# Altium PCB PCB1.PcbDoc
Units mm, origin at the board's own origin, x right, y up, seen from the top; angles counter-clockwise.
Board outline 130 x 90 mm, 4 copper layers (Top Layer, Layer 1, Layer 2, Bottom Layer), stack 0.603 mm thick; 110 components, 85 nets, 364 pads, 121 vias.
Unrouted connection lines stored in the file: 16.
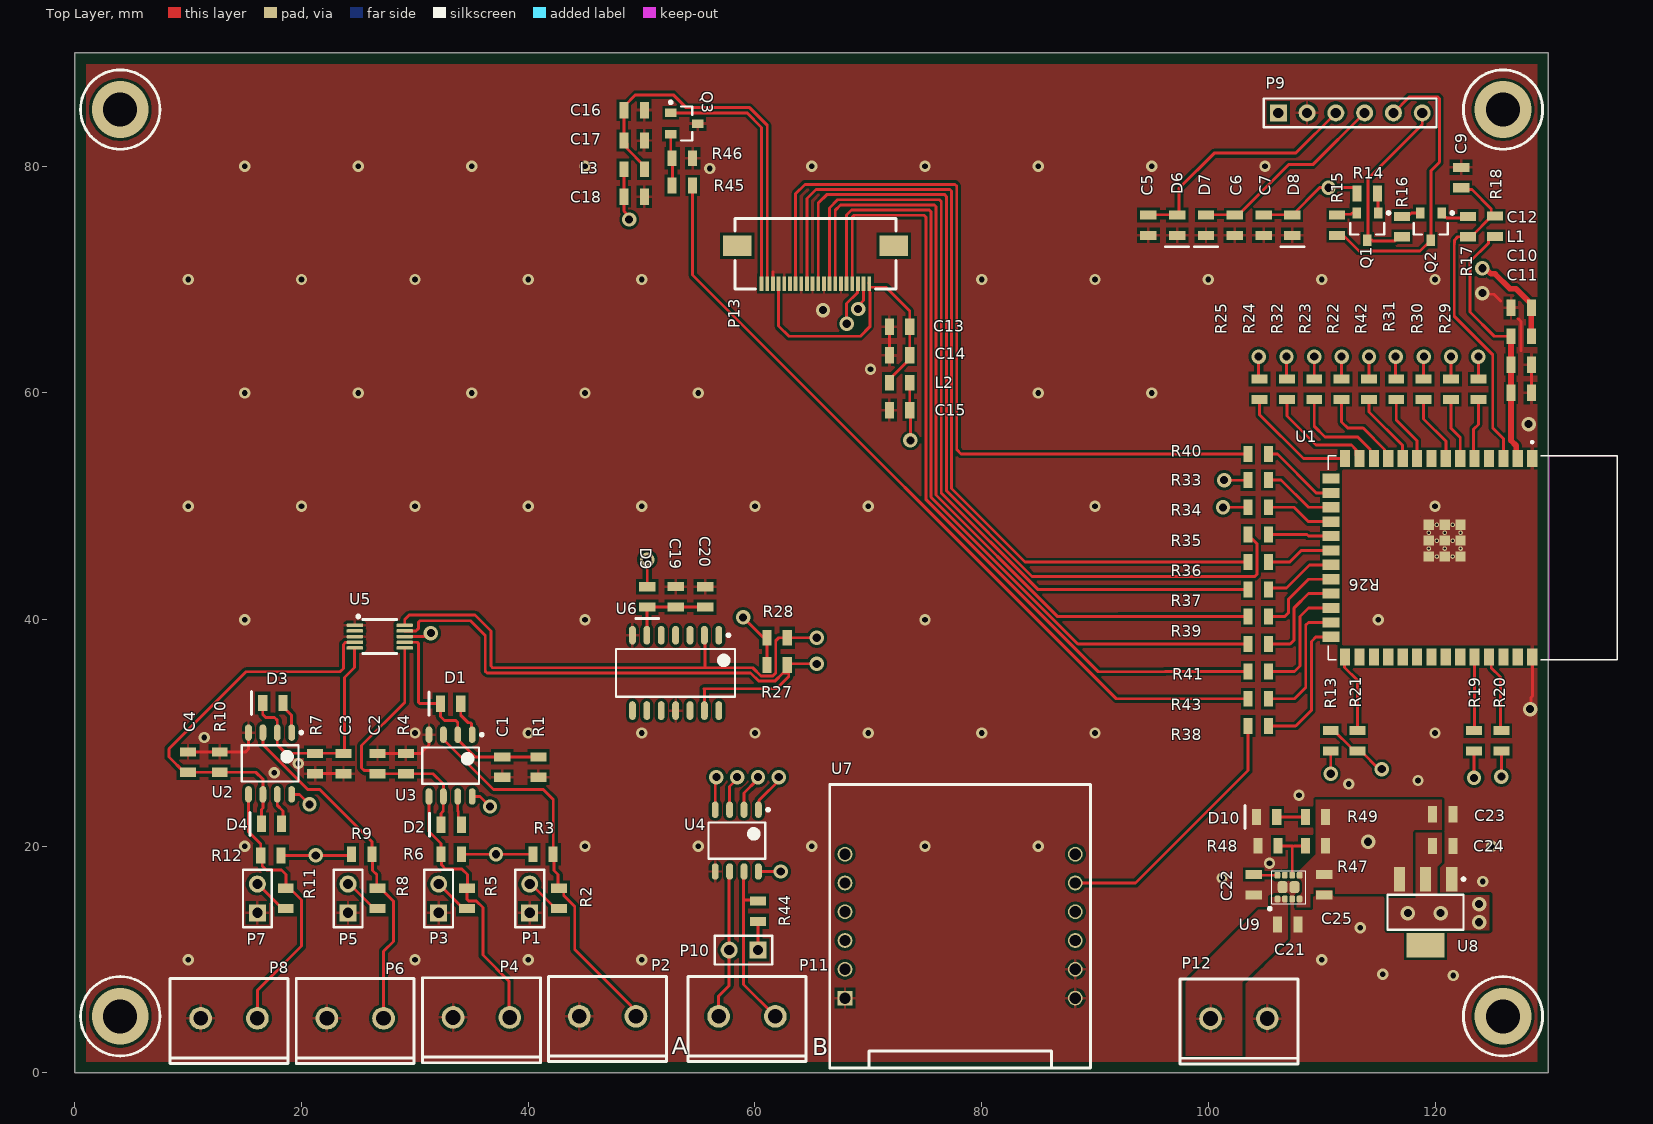
[diagram p0: Top Layer view]
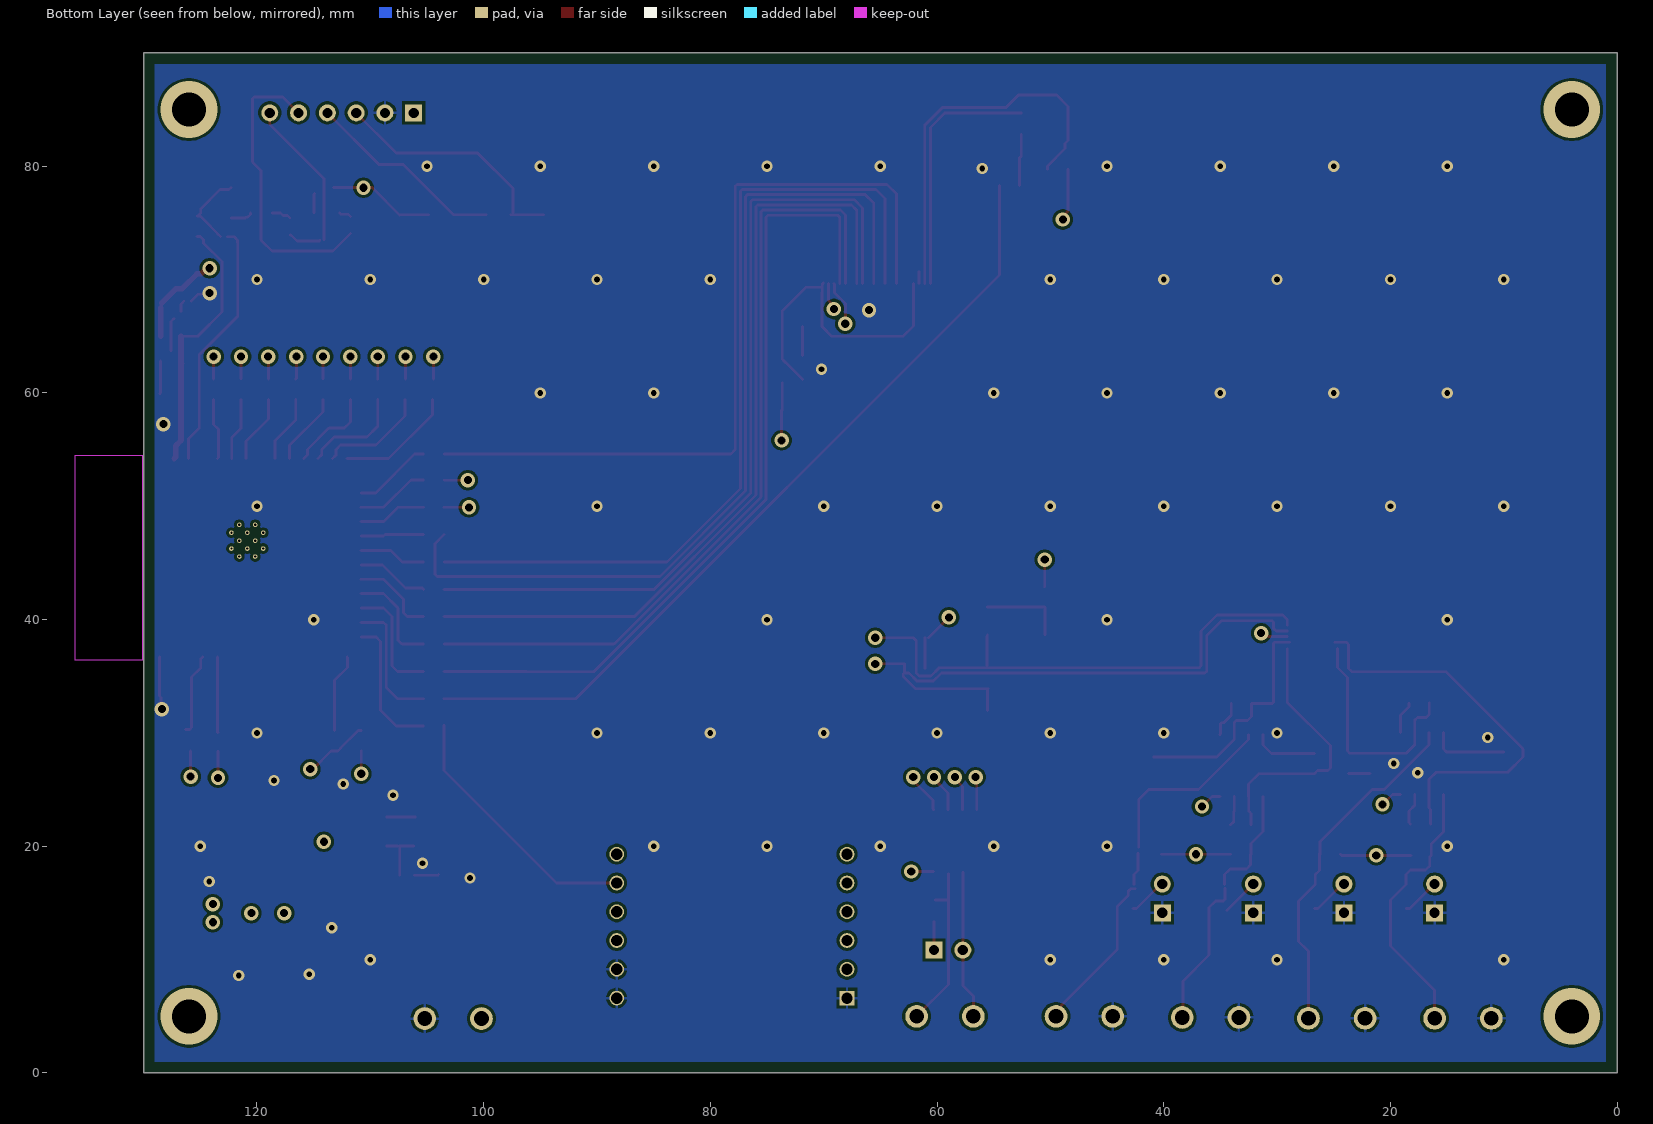
[diagram p1: Bottom Layer view, seen from below]
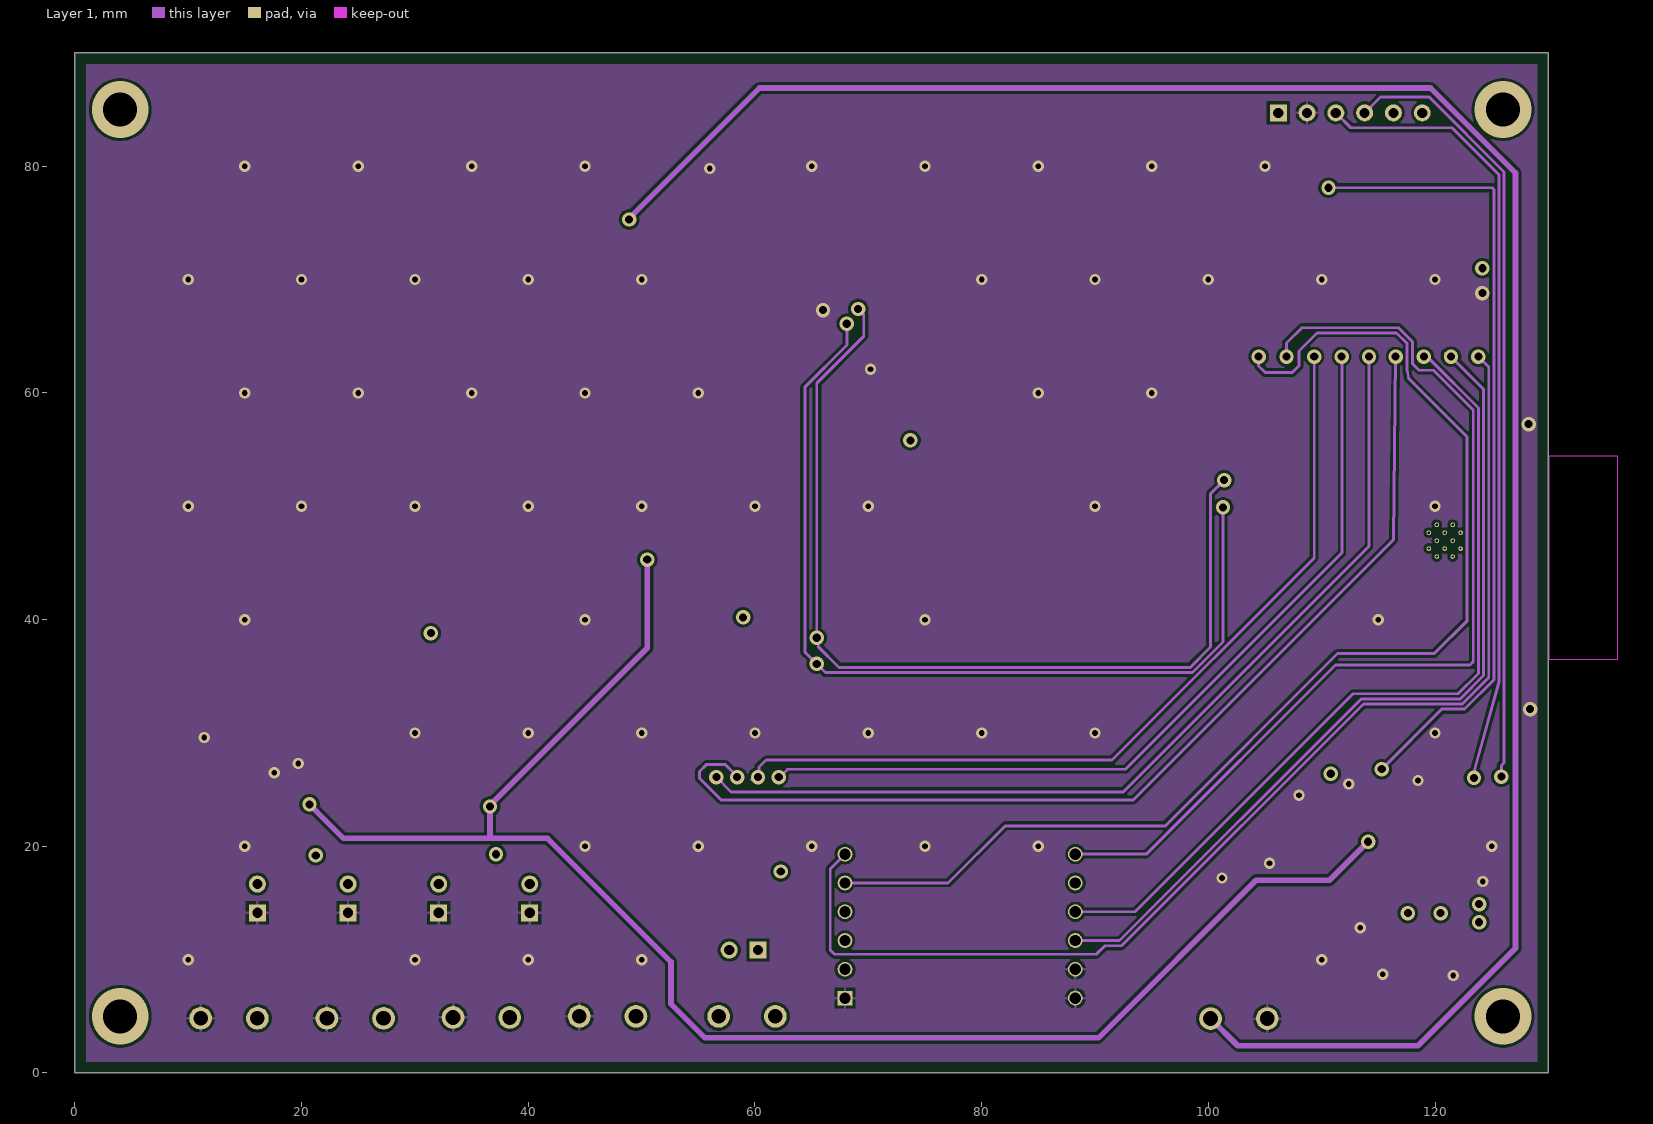
[diagram p2: Layer 1]
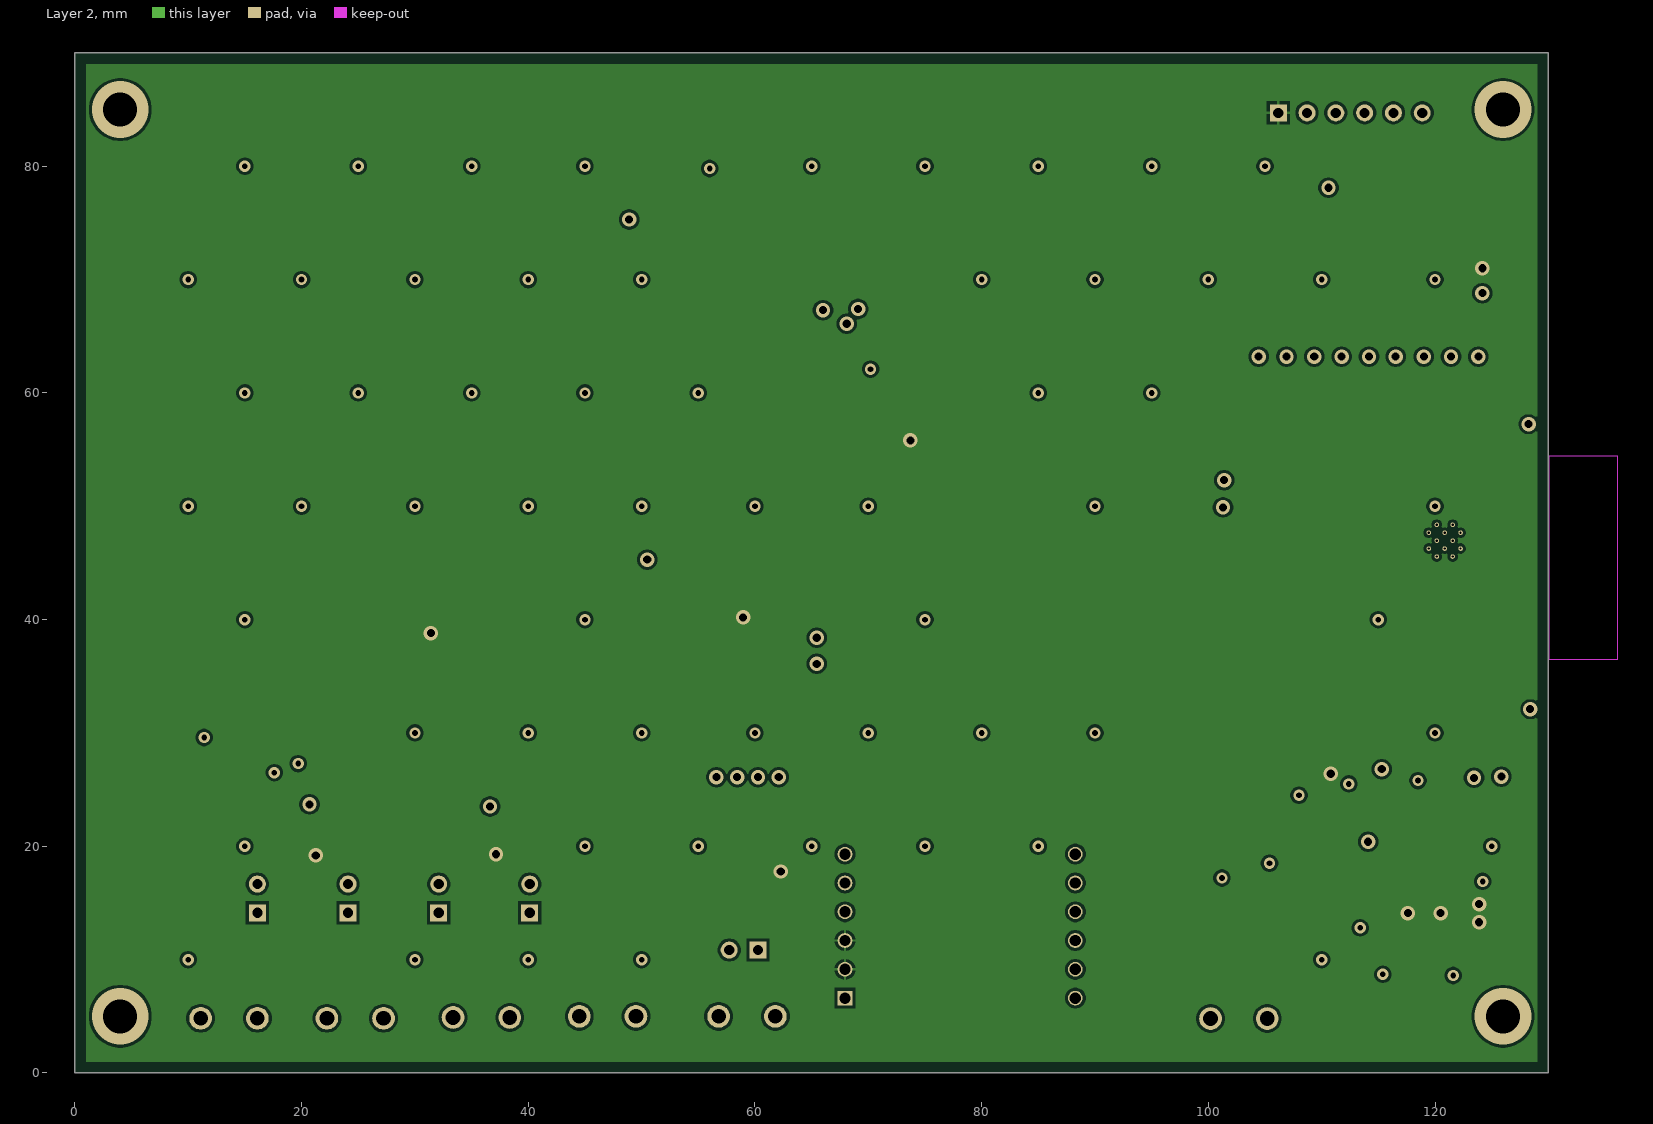
[diagram p3: Layer 2]

## Layer stack, top to bottom
Top Solder: solder mask 0.0102, Solder Resist, Dk 3.5
Top Layer: signal copper 0.0356
Dielectric 2: prepreg 0.0711, PP-006, Dk 4.1
Layer 1: signal copper 0.035
Dielectric 1: dielectric 0.32, FR-4, Dk 4.8
Layer 2: signal copper 0.035
Dielectric 3: prepreg 0.0711, PP-006, Dk 4.1
Bottom Layer: signal copper 0.0356
Bottom Solder: solder mask 0.0102, Solder Resist, Dk 3.5

## Board outline
0,0 0,90 130,90 130,0

## Design rules (kind name [scope] priority, off if disabled: settings)
Clearance [All] p1: gap=0.254 ignorepadtopadclearanceinfootprint=FALSE except(0: Arc-Hole Track-Hole SMDPad-Hole THPad-Hole Via-Hole Fill-Hole Poly-Hole Region-Hole Text-Hole; 0.15: Arc-SMDPad Track-SMDPad SMDPad-SMDPad; 0.2: Arc-Arc Arc-Track Track-Track)
HoleSize [All] p1: absolutevalues=TRUE maxlimit=3 minlimit=0.025 maxpercent=80.000 minpercent=20.000
MinimumSolderMaskSliver [All] p1: minsoldermaskwidth=0.1
PlaneConnect [All] p1: planeconnectstyle=Direct reliefexpansion=0.508 reliefentries=4 reliefconductorwidth=0.254 reliefairgap=0.254
PolygonConnect PolygonConnect_22 [All vs IsNamedPolygon('GND_L01_P010')] p1: thpad.connectstyle=Relief thpad.reliefconductorwidth=0.254 thpad.reliefentries=4 thpad.polygonreliefangle="90 Angle" thpad.airgapwidth=0.254 smdpad.connectstyle=Relief smdpad.reliefconductorwidth=0.254 smdpad.reliefentries=4 smdpad.polygonreliefangle="90 Angle" smdpad.airgapwidth=0.254 via.connectstyle=Direct via.reliefconductorwidth=0.254 via.reliefentries=4 via.polygonreliefangle="90 Angle" via.airgapwidth=0.254
PolygonConnect PolygonConnect_21 [All vs IsNamedPolygon('GND_L04_P006')] p2: thpad.connectstyle=Relief thpad.reliefconductorwidth=0.254 thpad.reliefentries=4 thpad.polygonreliefangle="90 Angle" thpad.airgapwidth=0.254 smdpad.connectstyle=Relief smdpad.reliefconductorwidth=0.254 smdpad.reliefentries=4 smdpad.polygonreliefangle="90 Angle" smdpad.airgapwidth=0.254 via.connectstyle=Direct via.reliefconductorwidth=0.254 via.reliefentries=4 via.polygonreliefangle="90 Angle" via.airgapwidth=0.254
PolygonConnect PolygonConnect_20 [All vs IsNamedPolygon('GND_L01_P010')] p3: thpad.connectstyle=Relief thpad.reliefconductorwidth=0.254 thpad.reliefentries=4 thpad.polygonreliefangle="90 Angle" thpad.airgapwidth=0.254 smdpad.connectstyle=Relief smdpad.reliefconductorwidth=0.254 smdpad.reliefentries=4 smdpad.polygonreliefangle="90 Angle" smdpad.airgapwidth=0.254 via.connectstyle=Direct via.reliefconductorwidth=0.254 via.reliefentries=4 via.polygonreliefangle="90 Angle" via.airgapwidth=0.254
PolygonConnect PolygonConnect_19 [All vs IsNamedPolygon('PS_GND')] p4: connectstyle=Direct reliefconductorwidth=0.254 reliefentries=4 polygonreliefangle="90 Angle" airgapwidth=0.254
PolygonConnect PolygonConnect_18 [All vs IsNamedPolygon('Vcc_PwrPlane')] p5: thpad.connectstyle=Relief thpad.reliefconductorwidth=0.254 thpad.reliefentries=4 thpad.polygonreliefangle="90 Angle" thpad.airgapwidth=0.254 smdpad.connectstyle=Direct smdpad.reliefconductorwidth=0.254 smdpad.reliefentries=4 smdpad.polygonreliefangle="90 Angle" smdpad.airgapwidth=0.254 via.connectstyle=Direct via.reliefconductorwidth=0.254 via.reliefentries=4 via.polygonreliefangle="90 Angle" via.airgapwidth=0.254
PolygonConnect PolygonConnect_17 [All vs IsNamedPolygon('12V_PwrPlane')] p6: thpad.connectstyle=Relief thpad.reliefconductorwidth=0.254 thpad.reliefentries=4 thpad.polygonreliefangle="90 Angle" thpad.airgapwidth=0.254 smdpad.connectstyle=Direct smdpad.reliefconductorwidth=0.254 smdpad.reliefentries=4 smdpad.polygonreliefangle="90 Angle" smdpad.airgapwidth=0.254 via.connectstyle=Direct via.reliefconductorwidth=0.254 via.reliefentries=4 via.polygonreliefangle="90 Angle" via.airgapwidth=0.254
PolygonConnect PolygonConnect_16 [All vs IsNamedPolygon('5v_PwrPlane')] p7: thpad.connectstyle=Relief thpad.reliefconductorwidth=0.254 thpad.reliefentries=4 thpad.polygonreliefangle="90 Angle" thpad.airgapwidth=0.254 smdpad.connectstyle=Direct smdpad.reliefconductorwidth=0.254 smdpad.reliefentries=4 smdpad.polygonreliefangle="90 Angle" smdpad.airgapwidth=0.254 via.connectstyle=Direct via.reliefconductorwidth=0.254 via.reliefentries=4 via.polygonreliefangle="90 Angle" via.airgapwidth=0.254
PolygonConnect PolygonConnect_15 [All vs IsNamedPolygon('GND_L04_P006')] p8: thpad.connectstyle=Relief thpad.reliefconductorwidth=0.254 thpad.reliefentries=4 thpad.polygonreliefangle="90 Angle" thpad.airgapwidth=0.254 smdpad.connectstyle=Relief smdpad.reliefconductorwidth=0.254 smdpad.reliefentries=4 smdpad.polygonreliefangle="90 Angle" smdpad.airgapwidth=0.254 via.connectstyle=Direct via.reliefconductorwidth=0.254 via.reliefentries=4 via.polygonreliefangle="90 Angle" via.airgapwidth=0.254
PolygonConnect PolygonConnect_14 [All vs IsNamedPolygon('VCC_L03_P008')] p9: thpad.connectstyle=Relief thpad.reliefconductorwidth=0.254 thpad.reliefentries=4 thpad.polygonreliefangle="90 Angle" thpad.airgapwidth=0.254 smdpad.connectstyle=Relief smdpad.reliefconductorwidth=0.254 smdpad.reliefentries=4 smdpad.polygonreliefangle="90 Angle" smdpad.airgapwidth=0.254 via.connectstyle=Direct via.reliefconductorwidth=0.254 via.reliefentries=4 via.polygonreliefangle="90 Angle" via.airgapwidth=0.254
PolygonConnect PolygonConnect_13 [All vs IsNamedPolygon('GND_L02_P007')] p10: thpad.connectstyle=Relief thpad.reliefconductorwidth=0.254 thpad.reliefentries=4 thpad.polygonreliefangle="90 Angle" thpad.airgapwidth=0.254 smdpad.connectstyle=Relief smdpad.reliefconductorwidth=0.254 smdpad.reliefentries=4 smdpad.polygonreliefangle="90 Angle" smdpad.airgapwidth=0.254 via.connectstyle=Direct via.reliefconductorwidth=0.254 via.reliefentries=4 via.polygonreliefangle="90 Angle" via.airgapwidth=0.254
PolygonConnect PolygonConnect_12 [All vs IsNamedPolygon('NONET_L01_P009')] p11: thpad.connectstyle=Relief thpad.reliefconductorwidth=0.254 thpad.reliefentries=4 thpad.polygonreliefangle="90 Angle" thpad.airgapwidth=0.254 smdpad.connectstyle=Relief smdpad.reliefconductorwidth=0.254 smdpad.reliefentries=4 smdpad.polygonreliefangle="90 Angle" smdpad.airgapwidth=0.254 via.connectstyle=Direct via.reliefconductorwidth=0.254 via.reliefentries=4 via.polygonreliefangle="90 Angle" via.airgapwidth=0.254
PolygonConnect PolygonConnect_11 [All vs IsNamedPolygon('ESP_Thermal_Connect')] p12: thpad.connectstyle=Direct thpad.reliefconductorwidth=0.254 thpad.reliefentries=4 thpad.polygonreliefangle="90 Angle" thpad.airgapwidth=0.254 smdpad.connectstyle=Direct smdpad.reliefconductorwidth=0.254 smdpad.reliefentries=4 smdpad.polygonreliefangle="90 Angle" smdpad.airgapwidth=0.254 via.connectstyle=Relief via.reliefconductorwidth=0.254 via.reliefentries=4 via.polygonreliefangle="90 Angle" via.airgapwidth=0.254
PolygonConnect PolygonConnect_10 [All vs IsNamedPolygon('GND_L01_P005')] p13: thpad.connectstyle=Relief thpad.reliefconductorwidth=0.254 thpad.reliefentries=4 thpad.polygonreliefangle="90 Angle" thpad.airgapwidth=0.254 smdpad.connectstyle=Direct smdpad.reliefconductorwidth=0.254 smdpad.reliefentries=4 smdpad.polygonreliefangle="90 Angle" smdpad.airgapwidth=0.254 via.connectstyle=Relief via.reliefconductorwidth=0.254 via.reliefentries=4 via.polygonreliefangle="90 Angle" via.airgapwidth=0.254
PolygonConnect PolygonConnect_9 [All vs IsNamedPolygon('VCC_L01_P004')] p14: thpad.connectstyle=Relief thpad.reliefconductorwidth=0.254 thpad.reliefentries=4 thpad.polygonreliefangle="90 Angle" thpad.airgapwidth=0.254 smdpad.connectstyle=Direct smdpad.reliefconductorwidth=0.254 smdpad.reliefentries=4 smdpad.polygonreliefangle="90 Angle" smdpad.airgapwidth=0.254 via.connectstyle=Relief via.reliefconductorwidth=0.254 via.reliefentries=4 via.polygonreliefangle="90 Angle" via.airgapwidth=0.254
PolygonConnect PolygonConnect_8 [All vs IsNamedPolygon('12V_L01_P000')] p15: thpad.connectstyle=Relief thpad.reliefconductorwidth=0.254 thpad.reliefentries=4 thpad.polygonreliefangle="90 Angle" thpad.airgapwidth=0.254 smdpad.connectstyle=Direct smdpad.reliefconductorwidth=0.254 smdpad.reliefentries=4 smdpad.polygonreliefangle="90 Angle" smdpad.airgapwidth=0.254 via.connectstyle=Relief via.reliefconductorwidth=0.254 via.reliefentries=4 via.polygonreliefangle="90 Angle" via.airgapwidth=0.254
PolygonConnect PolygonConnect_7 [All vs IsNamedPolygon('5V_L01_P002')] p16: thpad.connectstyle=Relief thpad.reliefconductorwidth=0.254 thpad.reliefentries=4 thpad.polygonreliefangle="90 Angle" thpad.airgapwidth=0.254 smdpad.connectstyle=Direct smdpad.reliefconductorwidth=0.254 smdpad.reliefentries=4 smdpad.polygonreliefangle="90 Angle" smdpad.airgapwidth=0.254 via.connectstyle=Relief via.reliefconductorwidth=0.254 via.reliefentries=4 via.polygonreliefangle="90 Angle" via.airgapwidth=0.254
PolygonConnect PolygonConnect_6 [All vs IsNamedPolygon('5V_L01_P001')] p17: thpad.connectstyle=Relief thpad.reliefconductorwidth=0.254 thpad.reliefentries=4 thpad.polygonreliefangle="90 Angle" thpad.airgapwidth=0.254 smdpad.connectstyle=Direct smdpad.reliefconductorwidth=0.254 smdpad.reliefentries=4 smdpad.polygonreliefangle="90 Angle" smdpad.airgapwidth=0.254 via.connectstyle=Relief via.reliefconductorwidth=0.254 via.reliefentries=4 via.polygonreliefangle="90 Angle" via.airgapwidth=0.254
PolygonConnect PolygonConnect_5 [All vs IsNamedPolygon('VCC_L01_P003')] p18: thpad.connectstyle=Relief thpad.reliefconductorwidth=0.254 thpad.reliefentries=4 thpad.polygonreliefangle="90 Angle" thpad.airgapwidth=0.254 smdpad.connectstyle=Direct smdpad.reliefconductorwidth=0.254 smdpad.reliefentries=4 smdpad.polygonreliefangle="90 Angle" smdpad.airgapwidth=0.254 via.connectstyle=Relief via.reliefconductorwidth=0.254 via.reliefentries=4 via.polygonreliefangle="90 Angle" via.airgapwidth=0.254
PolygonConnect PolygonConnect_4 [All vs IsNamedPolygon('12V_L01_P000')] p19: thpad.connectstyle=Relief thpad.reliefconductorwidth=0.254 thpad.reliefentries=4 thpad.polygonreliefangle="90 Angle" thpad.airgapwidth=0.254 smdpad.connectstyle=NoConnect smdpad.reliefconductorwidth=0.254 smdpad.reliefentries=4 smdpad.polygonreliefangle="90 Angle" smdpad.airgapwidth=0.254 via.connectstyle=Relief via.reliefconductorwidth=0.254 via.reliefentries=4 via.polygonreliefangle="90 Angle" via.airgapwidth=0.254
PolygonConnect PolygonConnect_3 [All vs IsNamedPolygon('5V_L01_P001')] p20: thpad.connectstyle=Relief thpad.reliefconductorwidth=0.254 thpad.reliefentries=4 thpad.polygonreliefangle="90 Angle" thpad.airgapwidth=0.254 smdpad.connectstyle=Direct smdpad.reliefconductorwidth=0.254 smdpad.reliefentries=4 smdpad.polygonreliefangle="90 Angle" smdpad.airgapwidth=0.254 via.connectstyle=Relief via.reliefconductorwidth=0.254 via.reliefentries=4 via.polygonreliefangle="90 Angle" via.airgapwidth=0.254
PolygonConnect PolygonConnect_2 [All vs IsNamedPolygon('12V_L01_P000')] p21: thpad.connectstyle=Relief thpad.reliefconductorwidth=0.254 thpad.reliefentries=4 thpad.polygonreliefangle="90 Angle" thpad.airgapwidth=0.254 smdpad.connectstyle=Direct smdpad.reliefconductorwidth=0.254 smdpad.reliefentries=4 smdpad.polygonreliefangle="90 Angle" smdpad.airgapwidth=0.254 via.connectstyle=Relief via.reliefconductorwidth=0.254 via.reliefentries=4 via.polygonreliefangle="90 Angle" via.airgapwidth=0.254
PolygonConnect PolygonConnect_1 [All vs IsNamedPolygon('12V_L01_P000')] p22: thpad.connectstyle=Relief thpad.reliefconductorwidth=0.254 thpad.reliefentries=4 thpad.polygonreliefangle="90 Angle" thpad.airgapwidth=0.254 smdpad.connectstyle=Direct smdpad.reliefconductorwidth=0.254 smdpad.reliefentries=4 smdpad.polygonreliefangle="90 Angle" smdpad.airgapwidth=0.254 via.connectstyle=Relief via.reliefconductorwidth=0.254 via.reliefentries=4 via.polygonreliefangle="90 Angle" via.airgapwidth=0.254
PolygonConnect [All] p23: connectstyle=Relief reliefconductorwidth=0.254 reliefentries=4 polygonreliefangle="90 Angle" airgapwidth=0.254
RoutingVias [All] p1: holewidth=0.711 width=1.27 viastyle="Through Hole" minholewidth=0.711 minwidth=1.27 maxholewidth=0.711 maxwidth=1.27
SilkToSilkClearance [All] p1: silktosilkclearance=0.1
SilkToSolderMaskClearance [IsPad] p1: minsilkscreentomaskgap=0.1 clearancetoexposedcopper=TRUE
SolderMaskExpansion [All] p1: expansion=0.102 istentingtop=FALSE
Width [All] p1: maxlimit=1 minlimit=0.254 preferedwidth=0.254 minimp=50.000000 maximp=50.000000 favimp=50.000000
25 further rules are at their usual default settings.

## Classes and differential pairs
component class Micro: * C5 C6 C7 C9 C10 C11 C12 C13 C14 C15 C16 C17 C18 D6 D7 D8 L1 L2 L3 P9 P10 P11 P13 Q1 Q2 Q3 R13 R14 R15 R16 R17 R18 R19 R20 R21 R22 R23 R24 R25 R26 R27 R28 R29 R30 R31 R32 R33 R34 R35 R36 R37 R38 R39 R40 R41 R42 R43 R44 R45 R46 U1 U4 U5
component class RTC-Power-Eth: * C19 C20 C21 C22 C23 C24 C25 D9 D10 P12 R47 R48 R49 U6 U7 U8 U9
component class AnalogIn: * *? C1 C2 C3 C4 D1 D2 D3 D4 P1 P2 P3 P4 P5 P6 P7 P8 R1 R2 R3 R4 R5 R6 R7 R8 R9 R10 R11 R12 U2 U3

## Components (designator, comment, footprint, x,y, rotation, side; value= is the part's Value field where it differs from the comment)
C1 "Cap" CAPC2012X04M 37.692,26.994 r90 top value=100pF
C2 "Cap" CAPC2012X04M 26.7,27.3 r270 top value=100pF
C3 "Cap" CAPC2012X04M 23.7,27.3 r90 top value=100pF
C4 "Cap" CAPC2012X04M 9.981,27.435 r270 top value=100pF
C5 "Cap" CAPC2012X04M 94.715,74.803 r90 top value=10pF
C6 "Cap" CAPC2012X04M 102.335,74.803 r90 top value=10pF
C7 "Cap" CAPC2012X04M 104.875,74.803 r90 top value=10pF
C9 "Cap" CAPC2012X04M 122.3,79 r90 top value=100pF
C10 "Cap" CAPC2012X04M 127.6,62.5 r0 top value=100pF
C11 "Cap" CAPC2012X04M 127.6,60 r0 top value=100pF
C12 "Cap" CAPC2012X04M 127.6,67.5 r180 top value=100pF
C13 "Cap" CAPC2012X04M 72.761,65.851 r180 top value=100nF
C14 "Cap" CAPC2012X04M 72.761,63.311 r180 top value=22uF
C15 "Cap" CAPC2012X04M 72.761,58.485 r180 top value=100nF
C16 "Cap" CAPC2012X04M 49.339,84.94 r0 top value=22uF
C17 "Cap" CAPC2012X04M 49.339,82.273 r0 top value=100nF
C18 "Cap" CAPC2012X04M 49.339,77.32 r0 top value=100nF
C19 "Cap" CAPC2012X04M 53.005,42.009 r90 top value=4.7uF
C20 "Cap" CAPC2012X04M 55.6,42 r90 top value=470nF
C21 "Cap" CAPC2012X04M 107,13.1 r0 top value=10uF
C22 "Cap" CAPC2012X04M 103.995,16.613 r270 top value=3.3nF
C23 "Cap" CAPC2012X04M 120.691,22.818 r0 top value=1uF
C24 "Cap" CAPC2012X04M 120.691,20.024 r0 top value=1uF
C25 "Cap" CAPC2012X04M 110.218,16.613 r270 top value=22uF
D1 "Diode" DIOC2012X04M 33.145,32.582 r180 top
D2 "Diode" DIOC2012X04M 33.2,21.9 r180 top
D3 "Diode" DIOC2012X04M 17.474,32.642 r180 top
D4 "Diode" DIOC2012X04M 17.347,21.974 r180 top
D6 "PJGBLC03C" DIOC2012X04M 97.255,74.803 r270 top
D7 "PJGBLC03C" DIOC2012X04M 99.795,74.803 r270 top
D8 "PJGBLC03C" DIOC2012X04M 107.415,74.803 r270 top
D9 "SS34" DIOC2012X04M 50.5,42 r270 top
D10 "LED1" DIOC2012X04M 105.138,22.582 r180 top
L1 "Inductor" RESC2012X04M 127.6,65 r0 top value=MG2029-601Y
L2 "Inductor" RESC2012X04M 72.761,60.898 r180 top value=MG2029-601Y
L3 "Inductor" RESC2012X04M 49.339,79.733 r180 top value=MG2029-601Y
P1 "Header 2" HDR1X2 40.13,14.13 r90 top
P2 "Header 2" "WURTH- WR-TBL 2pin 5mmpitch" 47,5 r0 top
P3 "Header 2" HDR1X2 32.1,14.13 r90 top
P4 "Header 2" "WURTH- WR-TBL 2pin 5mmpitch" 35.867,4.9 r0 top
P5 "Header 2" HDR1X2 24.1,14.13 r90 top
P6 "Header 2" "WURTH- WR-TBL 2pin 5mmpitch" 24.733,4.827 r0 top
P7 "Header 2" HDR1X2 16.1,14.13 r90 top
P8 "Header 2" "WURTH- WR-TBL 2pin 5mmpitch" 13.6,4.827 r0 top
P9 "Header 6" HDR1X6 106.172,84.709 r0 top
P10 "Header 2" HDR1X2 60.266,10.844 r180 top
P11 "Header 2" "WURTH- WR-TBL 2pin 5mmpitch" 59.3,5 r0 top
P12 "Header 2" "WURTH- WR-TBL 2pin 5mmpitch" 102.7,4.8 r0 top
P13 "CTM480272T53" CF31201D0R0-05-NH 65.336,73.889 r180 top
Q1 "NPN" SOT95P245X110-3N 114.027,74.676 r270 top
Q2 "NPN" SOT95P245X110-3N 119.634,74.676 r270 top
Q3 "MOSFET-N" SOT95P245X110-3N 53.768,83.762 r0 top
R1 "Res1" RESC2012X04M 40.892,26.994 r90 top value=1K
R2 "Res1" RESC2012X04M 42.7,15.4 r90 top value=1K
R3 "Res1" RESC2012X04M 41.3,19.3 r0 top value=1K
R4 "Res1" RESC2012X04M 29.2,27.3 r270 top value=1K
R5 "Res1" RESC2012X04M 34.6,15.4 r90 top value=1K
R6 "Res1" RESC2012X04M 33.2,19.3 r180 top value=1K
R7 "Res1" RESC2012X04M 21.2,27.3 r90 top value=1K
R8 "Res1" RESC2012X04M 26.7,15.4 r90 top value=1K
R9 "Res1" RESC2012X04M 25.3,19.3 r0 top value=1K
R10 "Res1" RESC2012X04M 12.775,27.435 r270 top value=1K
R11 "Res1" RESC2012X04M 18.6,15.4 r90 top value=1K
R12 "Res1" RESC2012X04M 17.3,19.2 r180 top value=1K
R13 "Res3" RESC2012X04M 110.8,29.3 r270 top value=4.7k
R14 "Res3" RESC2012X04M 114.027,77.597 r0 top value=0R
R15 "Res3" RESC2012X04M 111.36,74.803 r270 top value=10k
R16 "Res3" RESC2012X04M 117.094,74.676 r270 top value=10k
R17 "Res3" RESC2012X04M 122.901,74.676 r90 top value=0R
R18 "Res3" RESC2012X04M 125.3,74.7 r270 top value=10k
R19 "Res3" RESC2012X04M 123.444,29.3 r90 top value=0R
R20 "Res3" RESC2012X04M 125.857,29.3 r90 top value=0R
R21 "Res3" RESC2012X04M 113.157,29.3 r90 top value=0R
R22 "Res3" RESC2012X04M 114.173,60.325 r90 top value=0R
R23 "Res3" RESC2012X04M 111.76,60.325 r90 top value=0R
R24 "Res3" RESC2012X04M 106.934,60.325 r90 top value=0R
R25 "Res3" RESC2012X04M 104.521,60.325 r90 top value=0R
R26 "Res3" RESC2012X04M 104.394,37.846 r180 top value=0R
R27 "Res3" RESC2012X04M 61.951,36 r180 top value=2.2k
R28 "Res3" RESC2012X04M 61.951,38.4 r180 top value=2.2k
R29 "Res3" RESC2012X04M 123.825,60.325 r270 top value=0R
R30 "Res3" RESC2012X04M 121.412,60.325 r270 top value=0R
R31 "Res3" RESC2012X04M 118.999,60.325 r270 top value=0R
R32 "Res3" RESC2012X04M 109.347,60.325 r270 top value=0R
R33 "Res3" RESC2012X04M 104.394,52.324 r0 top value=0R
R34 "Res3" RESC2012X04M 104.394,49.911 r0 top value=0R
R35 "Res3" RESC2012X04M 104.394,47.498 r0 top value=0R
R36 "Res3" RESC2012X04M 104.394,45.085 r0 top value=0R
R37 "Res3" RESC2012X04M 104.394,42.672 r0 top value=0R
R38 "Res3" RESC2012X04M 104.394,30.607 r180 top value=0R
R39 "Res3" RESC2012X04M 104.394,40.259 r0 top value=0R
R40 "Res3" RESC2012X04M 104.394,54.61 r180 top value=0R
R41 "Res3" RESC2012X04M 104.394,35.433 r180 top value=0R
R42 "Res3" RESC2012X04M 116.586,60.325 r270 top value=0R
R43 "Res3" RESC2012X04M 104.394,33.02 r180 top value=0R
R44 "Res3" RESC2012X04M 60.266,14.273 r270 top value=120R
R45 "Res3" RESC2012X04M 53.6,78.3 r0 top value=1K
R46 "Res3" RESC2012X04M 53.6,80.7 r180 top value=100K
R47 "Res3" RESC2012X04M 109.456,20.042 r180 top value=78.8k
R48 "Res3" RESC2012X04M 105.265,20.042 r180 top value=15k
R49 "Res3" RESC2012X04M 109.456,22.582 r180 top value=60R
U1 "ESP32-S3-WROOM-1-N8R8" XCVR_ESP32S3WROOM1N8R8 123.317,45.466 r270 top
U2 "LM358" SOIC127P600X155-8N 17.22,27.308 r270 top
U3 "LM358" SOIC127P600X155-8N 33.145,27.121 r270 top
U4 "MAX485" SOIC127P600X155-8N 58.4,20.5 r270 top
U5 "ADS101x" VSSOP_10 26.9,38.5 r0 top
U6 "RX-8025T" SOP127P740X320-14N 53,35.3 r270 top
U7 "ACEIRMC W5500 Module" W5500Module 78.105,12.954 r180 top
U8 "TLV76133 - 3.3V" SOT230P700X180-4N 119.167,14.182 r270 top
U9 "TPS82150" TPS82150SIL 107.075,16.4 r90 top

## Footprints (in the part's own frame and the unit in brackets; to place one, negate y for a bottom-side part, rotate by r counter-clockwise, add the part's x,y. Pads: shape width x height; smd on the part's side, far side on the other; paste and mask are expansions set on the pad)
CAPC2012X04M [mm] "Chip Capacitor, 2-Leads, Body 2.00x1.20mm, IPC Low Density"
  rect 0.8x1.45 smd: 1(-0.9,0) 2(0.9,0)
  body extent -1.05,-0.65 1.05,0.65, height 0.45
CF31201D0R0-05-NH [mm]
  rect 0.35x1.3 smd: 1(-4.75,4.25) 2(-4.25,4.25) 3(-3.75,4.25) 4(-3.25,4.25) 5(-2.75,4.25) 6(-2.25,4.25) 7(-1.75,4.25) 8(-1.25,4.25) 9(-0.75,4.25) 10(-0.25,4.25) 11(0.25,4.25) 12(0.75,4.25) 13(1.25,4.25) 14(1.75,4.25) 15(2.25,4.25) 16(2.75,4.25) 17(3.25,4.25) 18(3.75,4.25) 19(4.25,4.25) 20(4.75,4.25)
  rect 2.5x1.8 smd: NC(-6.9,0.9) NC(6.9,0.9)
  silkscreen extent -7.1,-1.5 7.1,4.72
DIOC2012X04M [mm] "Chip Diode, 2-Leads, Body 2.00x1.20mm, IPC Low Density"
  rect 0.8x1.45 smd: 1(-0.9,0) 2(0.9,0)
  silkscreen extent 1.91,-1.02 1.91,1.02, body extent -1.05,-0.65 1.05,0.65, height 0.45
HDR1X2 [mm] "Connector; Header; 2 Position"
  rect 1.5x1.5 hole 0.9: 1(0,0)
  round 1.5 hole 0.9: 2(2.54,0)
  silkscreen extent -1.27,-1.27 3.81,1.27
HDR1X6 [mm] "Connector; Header; 6 Position"
  rect 1.5x1.5 hole 0.9: 1(0,0)
  round 1.5 hole 0.9: 2(2.54,0) 3(5.08,0) 4(7.62,0) 5(10.16,0) 6(12.7,0)
  silkscreen extent -1.27,-1.27 13.97,1.27
RESC2012X04M [mm] "Chip Resistor, 2-Leads, Body 2.00x1.20mm, IPC Low Density"
  rect 0.8x1.4 smd: 1(-0.9,0) 2(0.9,0)
  body extent -1.05,-0.65 1.05,0.65, height 0.45
SOIC127P600X155-8N [mm] "SOIC, 8-Leads, Body 4.90x3.90mm, Pitch 1.27mm, IPC Medium Density"
  oval 1.45x0.6 smd: 1(-2.725,1.905) 2(-2.725,0.635) 3(-2.725,-0.635) 4(-2.725,-1.905) 5(2.725,-1.905) 6(2.725,-0.635) 7(2.725,0.635) 8(2.725,1.905)
  silkscreen extent -2.85,-2.5 1.6,2.88, body extent -2,-2.5 2,2.5, height 1.55
SOP127P740X320-14N [mm] "SOP, 14-Leads, Body 10.30x5.00mm, Pitch 1.27mm, IPC Medium Density"
  oval 1.65x0.6 smd: 1(-3.325,3.81) 2(-3.325,2.54) 3(-3.325,1.27) 4(-3.325,0) 5(-3.325,-1.27) 6(-3.325,-2.54) 7(-3.325,-3.81) 8(3.325,-3.81) 9(3.325,-2.54) 10(3.325,-1.27) 11(3.325,0) 12(3.325,1.27) 13(3.325,2.54) 14(3.325,3.81)
  silkscreen extent -3.45,-5.25 2.1,5.25, body extent -2.5,-5.25 2.5,5.25, height 3.2
SOT95P245X110-3N [mm] "SOT23, 3-Leads, Body 2.90x2.45mm, Pitch 0.95mm, IPC Medium Density"
  rect 1x0.75 smd: 1(-1.2,0.95) 2(-1.2,-0.95) 3(1.2,0)
  silkscreen extent -1.32,-1.5 0.7,2, body extent -0.7,-1.5 0.7,1.5, height 1.1
SOT230P700X180-4N [mm] "SOT223, 4-Leads, Body 6.50x7.00mm (avg), Pitch 2.30mm, IPC Medium Density"
  rect 2.15x1 smd: 1(-2.925,2.3) 2(-2.925,0) 3(-2.925,-2.3)
  rect 2.15x3.35 smd: 4(2.925,0)
  silkscreen extent -3.05,-3.35 1.55,3.48, body extent -1.85,-3.35 1.85,3.35, height 1.8
TPS82150SIL [mm]
  rrect50% 0.6x0.5 smd mask-0.05: 1(-1.05,0.975) 2(-1.05,0.325) 3(-1.05,-0.325) 4(-1.05,-0.975) 5(1.05,-0.975) 6(1.05,-0.325) 7(1.05,0.325) 8(1.05,0.975)
  rrect50% 1.04x0.85 smd mask+0: 3(0,0.525) 3(0,-0.525)
  silkscreen extent -2.03,-1.5 1.45,1.78
VSSOP_10 [mm]
  rrect50% 1.45x0.3 smd mask+0.05: 1(-2.2,1) 2(-2.2,0.5) 3(-2.2,0) 4(-2.2,-0.5) 5(-2.2,-1) 6(2.2,-1) 7(2.2,-0.5) 8(2.2,0) 9(2.2,0.5) 10(2.2,1)
  silkscreen extent -2.03,-1.5 1.5,1.9
W5500Module [mm]
  rect 1.3x1.3 hole 1: 1(10.16,6.35)
  round 1.3 hole 1: 2(10.16,3.81) 3(10.16,1.27) 4(10.16,-1.27) 5(10.16,-3.81) 6(10.16,-6.35) 7(-10.16,-6.35) 8(-10.16,-3.81) 9(-10.16,-1.27) 10(-10.16,1.27) 11(-10.16,3.81) 12(-10.16,6.35)
  silkscreen extent -11.5,-12.5 11.5,12.5
"WURTH- WR-TBL 2pin 5mmpitch" [mm]
  round 2 hole 1.3: 1(-2.5,0) 2(2.5,0)
  silkscreen extent -5.2,-4 5.2,3.5
XCVR_ESP32S3WROOM1N8R8 [mm]
  rect 1.5x0.9 smd: 1(-8.75,5.26) 2(-8.75,3.99) 3(-8.75,2.72) 4(-8.75,1.45) 5(-8.75,0.18) 6(-8.75,-1.09) 7(-8.75,-2.36) 8(-8.75,-3.63) 9(-8.75,-4.9) 10(-8.75,-6.17) 11(-8.75,-7.44) 12(-8.75,-8.71) 13(-8.75,-9.98) 14(-8.75,-11.25) 27(8.75,-11.25) 28(8.75,-9.98) 29(8.75,-8.71) 30(8.75,-7.44) 31(8.75,-6.17) 32(8.75,-4.9) 33(8.75,-3.63) 34(8.75,-2.36) 35(8.75,-1.09) 36(8.75,0.18) 37(8.75,1.45) 38(8.75,2.72) 39(8.75,3.99) 40(8.75,5.26)
  rect 0.9x1.5 smd: 15(-6.985,-12.5) 16(-5.715,-12.5) 17(-4.445,-12.5) 18(-3.175,-12.5) 19(-1.905,-12.5) 20(-0.635,-12.5) 21(0.635,-12.5) 22(1.905,-12.5) 23(3.175,-12.5) 24(4.445,-12.5) 25(5.715,-12.5) 26(6.985,-12.5)
  rect 0.9x0.9 smd: 41_1(-1.5,-2.46) 41_2(-2.9,-2.46) 41_3(-0.1,-2.46) 41_4(-2.9,-3.86) 41_5(-1.5,-3.86) 41_6(-0.1,-3.86) 41_7(-2.9,-1.06) 41_8(-1.5,-1.06) 41_9(-0.1,-1.06)
  round 0.4 hole 0.2 mask+0: 41_10(-1.5,-1.76) 41_11(-2.9,-1.76) 41_12(-0.1,-1.76) 41_13(-2.9,-3.16) 41_14(-1.5,-3.16) 41_15(-0.1,-3.16) 41_16(-2.2,-1.06) 41_17(-0.8,-1.06) 41_18(-2.2,-2.46) 41_19(-0.8,-2.46) 41_20(-2.2,-3.86) 41_21(-0.8,-3.86)
  Keep-Out Layer region: 9,6.75 -9,6.75 -9,12.75 9,12.75
  Keep-Out Layer region: 9,6.75 -9,6.75 -9,12.75 9,12.75
  silkscreen extent -10.3,-12.75 9,12.75, body extent -9,-12.75 9,12.75, height 3.25

## Part data
C1 C2 C3 C4 C5 C6 C7 C9 C10 C11 C12 C13 C14 C15 C16 C17 C18 C19 C20 C21 C22 C23 C24 C25: "Capacitor", LatestRevisionDate=17-Jul-2002, LatestRevisionNote="Re-released for DXP Platform.", PackageDescription="Radial Cap, Thru-Hole; 2 Leads; 0.3 in Pin Spacing", PackageReference=RAD-0.3, Published=8-Jun-2000, Publisher="Altium Limited"
D1 D2 D3 D4: "Default Diode", Code_JEDEC=DO-214-AB, LatestRevisionDate=17-Jul-2002, LatestRevisionNote="Re-released for DXP Platform.", PackageDescription="DO-214-AB/SMC; 2 C-Bend Leads; Body 7.9 x 5.9 mm, inc. leads (LxW)", PackageReference=SMC, PackageVersion=Sep-1996, Published=8-Jun-2000, Publisher="Altium Limited"
D6 D7 D8: library part SP4021-01FTG, Manufacturer=Littelfuse, Mounting Technology="Surface Mount", PackageReference=SOD-323-2, PartNumber=SP4021-01FTG
D9: library part Diode, "Default Diode", Code_JEDEC=DO-214-AB, LatestRevisionDate=17-Jul-2002, LatestRevisionNote="Re-released for DXP Platform.", PackageDescription="DO-214-AB/SMC; 2 C-Bend Leads; Body 7.9 x 5.9 mm, inc. leads (LxW)", PackageReference=SMC, PackageVersion=Sep-1996, Published=8-Jun-2000, Publisher="Altium Limited"
D10: "Typical RED GaAs LED", LatestRevisionDate=08-Jul-2005, LatestRevisionNote="Mech Layer 1 removed.", PackageDescription="LED; 2 Leads", PackageReference=LED-1, Published=8-Jun-2000, Publisher="Altium Limited"
P1 P2 P3 P4 P5 P6 P7 P8 P10 P11 P12: "Header, 2-Pin", LatestRevisionDate=17-Jul-2002, LatestRevisionNote="Re-released for DXP Platform.", Publisher="Altium Limited"
P9: "Header, 6-Pin", LatestRevisionDate=17-Jul-2002, LatestRevisionNote="Re-released for DXP Platform.", Publisher="Altium Limited"
Q1 Q2: "NPN Bipolar Transistor", Code_JEDEC=TO-226-AA, LatestRevisionDate=17-Jul-2002, LatestRevisionNote="Re-released for DXP Platform.", PackageDescription="TO, Flat Index; 3 In-Line, Axial Leads; Body Dia. 4.8mm; Leads 0.55 x 0.51 mm (max)", PackageReference=TO-226-AA, Published=8-Jun-2000, Publisher="Altium Limited"
Q3: "N-Channel MOSFET", LatestRevisionDate=17-Jul-2002, LatestRevisionNote="Re-released for DXP Platform.", PackageDescription="TO, Flat Index; 3 In-Line, Axial Leads; Body Dia. 4.6mm; Lead Dia. 0.5 mm (max)", PackageReference=E3, PackageVersion=1995/1996, Published=8-Jun-2000, Publisher="Altium Limited"
R1 R2 R3 R4 R5 R6 R7 R8 R9 R10 R11 R12 R13 R14 R15 R16 R17 R18 R19 R20 R21 R22 R23 R24 R25 R26 R27 R28 R29 R30 R31 R32 R33 R34 R35 R36 R37 R38 R39 R40 R41 R42 R43 R44 R45 R46 R47 R48 R49: "Resistor", Published=8-Jun-2000, Publisher="Altium Limited"
  R1 R2 R3 R4 R5 R6 R7 R8 R9 R10 R11 R12: LatestRevisionDate=17-Jul-2002, LatestRevisionNote="Re-released for DXP Platform.", PackageDescription="Axial Device, Thru-Hole; 2 Leads; 0.3 in Pin Spacing", PackageReference=AXIAL-0.3
  R13 R14 R15 R16 R17 R18 R19 R20 R21 R22 R23 R24 R25 R26 R27 R28 R29 R30 R31 R32 R33 R34 R35 R36 R37 R38 R39 R40 R41 R42 R43 R44 R45 R46 R47 R48 R49: LatestRevisionDate=29-May-2009, LatestRevisionNote="IPC-7351 Footprint Added.", PackageDescription="Chip Resistor", PackageReference=J1-0603
U1: "Bluetooth, WiFi 802.11b/g/n, Bluetooth v5.0 Transceiver Module 2.4GHz PCB Trace Surface Mount", Package=None, Availability="In Stock", Check_prices=https://www.snapeda.com/parts/ESP32-S3-WROOM-1-N8R8/Espressif+Systems/view-part/?ref=eda, MF="Espressif Systems", MP=ESP32-S3-WROOM-1-N8R8, Price=None, Purchase-URL=https://pricing.snapeda.com/search?q=ESP32-S3-WROOM-1-N8R8&ref=eda, SnapEDA_Link=https://www.snapeda.com/parts/ESP32-S3-WROOM-1-N8R8/Espressif+Systems/view-part/?ref=snap
U8: library part "Generic LDO"
L1 L2 L3: Code_IEC=1005, Code_JEITA=0402, LatestRevisionDate=29-May-2009, LatestRevisionNote="IPC-7351 Footprint Added.", PackageDescription="Chip Inductor", PackageReference=0402-A, Published=8-Jun-2000, Publisher="Altium Limited"

## Via types
v1: diameter 1, hole 0.5, Top Layer to Bottom Layer, 73 vias
v2: diameter 1.27, hole 0.711, Top Layer to Bottom Layer, 44 vias
v3: diameter 5, hole 3, Top Layer to Bottom Layer, 4 vias

## Nets (pads, with @x,y where several pads share a name; then routed paths per layer and width w, separated by ;. In a path a pad name is that pad's centre, name@x,y a point inside that pad or via, vN(x,y) a via of type N, cw(c..) or ccw(c..) an arc to the next point about the centre after c; other vN are vias at no path point)
5V: C23.1 C25.1 D9.1 R47.1 R49.1 U2.8 U3.8 U8.3 U9.4 U9.5 | length 147.3
  Top Layer w0.254: U2.8 19.817,24.583 v2(20.7,23.7) ; U3.8 35.742,24.396 v2(36.625,23.513) ; D9.1 50.5,44.6
  Layer 1 w0.5: v2(20.7,23.7) 23.7,20.7 36.625,20.7 ; v2@36.569,23.569 v2@36.625,23.625 ; v2(50.5,45.293) 50.5,37.5 v2@36.625,23.625 ; v2(114.1,20.4) 110.7,17 104.2,17 90.3,3.1 55.6,3.1 52.6,6.1 52.6,9.8 41.7,20.7 36.625,20.7 ; 36.625,20.7 v2(36.625,23.513) v2@36.625,23.625
12V: C18.1 C21.1 L3.2 P12.1 U9.1 U9.2 | length 190.7
  Top Layer w0.254: L3.2 48.439,76.036 48.9,75.575 v2(48.9,75.3)
  Layer 1 w0.5: v2@48.764,75.264 60.4,86.9 119.6,86.9 127.1,79.4 127.1,11 118.5,2.4 102.6,2.4 P12.1
DTR: P9.6 Q1.3 R16.2 | length 16.1
  Top Layer w0.254: Q1.3@114.1,73.476 114.1,78.9 118.872,83.672 P9.6 ; 114.427,73.476 114.497,73.406 116.474,73.406 116.994,73.926 R16.2@117.094,73.926
ESP32_EN: C9.1 R17.1 R18.1 U1.3 | length 29.2
  Top Layer w0.254: C9.1 122.457,77.943 123.257,77.943 124.968,76.232 124.968,75.873 125.241,75.6 R18.1 125,75.6 124.727,75.327 124.727,75.322 123.474,74.069 123.474,74.049 123.226,73.801 R17.1@123.206,73.801 ; R17.1@122.601,73.776 122.301,73.776 122.009,73.776 121.736,73.503 121.736,73.211 121.7,73.175 121.7,66.763 125.1,63.363 125.1,56.9 126.037,55.963 U1.3
Eth_CS: R38.2 U7.8 | length 23.4
  Top Layer w0.254: U7.8 93.564,16.764 103.5,26.7 R38.2@103.5,30.7
Eth_INT: R24.2 U7.7 | length 88.7
  Top Layer w0.254: R24.2@106.894,61.225 v2(106.894,63.2)
  Layer 1 w0.254: U7.7 94.526,19.304 111.222,36 123.1,36 123.376,36.276 123.376,58.482 119.858,62 118.6,62 118,62.6 118,64.542 116.788,65.754 108.254,65.754 106.894,64.394 v2(106.894,63.2)
Eth_MISO: R29.1 U7.6 | length 108.1
  Top Layer w0.254: R29.1 v2(123.825,63.2)
  Layer 1 w0.254: U7.6 66.641,18 66.641,10.859 67.021,10.48 90.12,10.48 90.871,11.23 92.354,11.23 113.678,32.554 122.412,32.554 124.738,34.88 124.738,62.287 124.125,62.9 v2@123.6,62.9
Eth_MOSI: R30.1 U7.10 | length 77.6
  Top Layer w0.254: R30.1 v2(121.412,63.2)
  Layer 1 w0.254: U7.10 92.166,11.684 113.49,33.008 122.224,33.008 124.284,35.068 124.284,60.328 121.518,63.094 121.306,63.094 v2@120.9,63.5
Eth_Reset: R25.2 U7.5 | length 109.8
  Top Layer w0.254: R25.2@104.441,61.225 v2(104.441,63.2)
  Layer 1 w0.254: U7.5 77.046,16.764 82.082,21.8 96.2,21.8 111.4,37 119.939,37 122.838,39.899 122.838,56.116 117.677,61.277 117.546,61.961 117.546,64.354 117.472,64.428 116.6,65.3 109.6,65.3 108,63.7 108,62.4 107.4,61.8 105.025,61.8 104.441,62.384 v2(104.441,63.2)
Eth_SCLK: R31.1 U7.9 | length 76.4
  Top Layer w0.254: R31.1 118.999,63.183 v2(119.016,63.2)
  Layer 1 w0.254: U7.9 93.524,14.224 112.762,33.462 122.036,33.462 123.83,35.256 123.83,58.67 119.622,62.878 119.613,62.878 119.291,63.2 v2(119.016,63.2)
GND: C1.1 C2.1 C3.1 C4.1 C5.1 C6.1 C7.1 C9.2 C10.2 C11.2 C12.2 C13.2 C14.2 C15.2 C16.2 C17.2 C18.2 C19.2 C20.2 C21.2 C22.2 C23.2 C24.2 C25.2 D6.2 D7.2 D8.2 D10.2 P1.1 P2.1 P3.1 P4.1 P5.1 P6.1 P7.1 P8.1 P9.2 P12.2 P13.6 P13.9 P13.11 P13.13 P13.16 P13.18 Q3.3 R1.1 R4.1 R7.1 R10.1 R46.1 R48.2 U1.1 U1.40 U1.41_1 U1.41_2 U1.41_3 U1.41_4 U1.41_5 U1.41_6 U1.41_7 U1.41_8 U1.41_9 U1.41_10 U1.41_11 U1.41_12 U1.41_13 U1.41_14 U1.41_15 U1.41_16 U1.41_17 U1.41_18 U1.41_19 U1.41_20 U1.41_21 U2.4 U3.4 U4.5 U5.1 U5.3 U6.7 U6.11 U7.1 U7.11 U7.12 U8.1 U9.3 | length 32.2
  Top Layer w0.254: C4.1 R10.1 15.072,28.335 15.315,28.578 U2.4 ; P7.1 P7.1@16.2,14.03 ; R7.1@21.792,26.408 C3.1@23.7,26.408 ; P5.1 P5.1@24.2,14.03 ; C2.1 R4.1 30.5,28.2 31.24,28.94 U3.4 ; P3.1 P3.1@32.2,14.03 ; P1.1@40.1,14.13 P1.1@40.2,14.03 ; P13.18 61.586,70.686 ; C14.2 C13.2 ; v2(124.176,68.8) 124.268,68.708 125.192,68.708 125.802,68.098 ; C12.2@126.427,68.098 126.7,67.825 C12.2 C12.2@126.7,67.175 ; 127.332,66.543 127.357,66.543 127.6,66.3 127.6,63.725 ; v2(128.4,32.1) 128.473,32.173 128.473,33.116 128.6,33.243 128.6,36.693 U1.40 ; C10.2@128.5,62.427 C11.2 C11.2@128.577,59.923 ; C10.2 C10.2@128.5,62.825
  other v1: 121.6,8.6 115.4,8.7 10,10 30,10 40,10 50,10 110,10 113.4,12.8 124.2,16.9 101.2,17.2 105.4,18.5 15,20 45,20 55,20 65,20 75,20 85,20 125,20 108,24.5 112.4,25.5 118.5,25.8 17.6,26.5 19.7,27.3 11.4,29.6 30,30 40,30 50,30 60,30 70,30 80,30 90,30 120,30 15,40 45,40 75,40 115,40 10,50 20,50 30,50 40,50 50,50 60,50 70,50 90,50 120,50 15,60 25,60 35,60 45,60 55,60 85,60 95,60 70.2,62.1 10,70 20,70 30,70 40,70 50,70 80,70 90,70 100,70 110,70 120,70 56,79.8 15,80 25,80 35,80 45,80 65,80 75,80 85,80 95,80 105,80
  other v2: 128.254,57.246 66,67.3
NetC1_2: C1.2 D1.2 R1.2 U3.2 U5.7 | length 20.7
  Top Layer w0.254: U5.7@28.9,38 30.206,38 30.3,37.906 30.3,32.731 30.449,32.582 D1.2 32.245,31.455 32.6,31.1 33.6,31.1 33.78,30.92 U3.2 33.78,29.421 35.307,27.894 C1.2 R1.2
NetC2_2: C2.2 D2.2 R4.2 U3.6 U5.6 | length 23.6
  Top Layer w0.254: U5.6@29.1,37.419 29.1,32.7 25.3,28.9 25.3,26.9 25.527,26.673 26.427,26.673 C2.2 R4.2 31.6,26.4 32.51,25.49 U3.6 32.5,24.386 32.5,23.1 32.3,22.9 D2.2
NetC3_2: C3.2 D3.2 R7.2 U2.2 U5.5 | length 20.4
  Top Layer w0.254: D3.2 16.574,31.637 16.839,31.372 17.601,31.372 17.855,31.118 U2.2 17.855,28.959 18.606,28.208 23.608,28.208 23.8,28.4 23.8,34.9 24.672,35.772 U5.5@24.672,37.434
NetC4_2: C4.2 D4.2 R10.2 U2.6 U5.4 | length 35.5
  Top Layer w0.254: D4.2 16.458,21.985 16.458,23.244 16.585,23.371 U2.6 16.585,25.911 15.961,26.535 R10.2 C4.2 9.656,26.535 8.3,27.891 8.3,28.6 15.1,35.4 23.4,35.4 23.698,35.698 23.698,37.798 23.9,38 U5.4 U5.4@24.9,38
NetC10_1: C10.1 C11.1 L1.1 R18.2 U1.2 | length 23.5
  Top Layer w0.254: R18.2 125.008,73.8 124.735,73.527 124.735,73.235 123.1,71.6 123.1,67.135 125.235,65 L1.1 ; C10.1@126.513,62.613 C10.1@126.7,62.427
  Top Layer w0.5: C10.1@126.7,62.427 126.7,55.8 127.165,55.335 127.165,54.358 U1.2 ; C10.1 L1.1
NetC13_1: C13.1 C14.1 L2.2 P13.1 P13.17 | length 27.6
  Top Layer w0.254: P13.17 62.086,65.914 63,65 69.3,65 70.135,65.835 70.135,68.873 ; P13.1@70.038,69.687 P13.1@70.134,69.591 ; P13.1 P13.1@70.134,69.591 ; 70.134,68.874 P13.1@70.134,69.327 ; L2.2@71.861,61.198 73.376,62.713 73.388,62.713 73.661,62.986 C14.1 C13.1 73.661,66.176 73.661,67.239 71.573,69.327 P13.1@70.134,69.327 ; P13.1@70.134,69.327 P13.1@70.134,69.591
NetC16_1: C16.1 C17.1 L3.1 P13.19 | length 34.4
  Top Layer w0.254: L3.1 50.239,80.033 48.712,81.56 48.712,82 C17.1 C16.1 48.439,85.265 49.474,86.3 52.8,86.3 53.934,85.166 59.534,85.166 61.086,83.614 P13.19
NetC19_1: C19.1 C20.1 D9.2 U6.6 | length 7.6
  Top Layer w0.254: U6.6 50.46,41.06 D9.2 C20.1
NetC22_1: C22.1 U9.8 | length 2.1
  Top Layer w0.254: C22.1 104.058,17.45 U9.8
NetD1_1: D1.1 U3.1 | length 3.3
  Top Layer w0.254: D1.1 34.045,31.555 34.7,30.9 34.901,30.9 34.984,30.817 34.984,29.912 U3.1
NetD2_1: D2.1 U3.7 | length 2.6
  Top Layer w0.254: U3.7 33.78,23.12 33.827,23.073 33.827,22.173 D2.1
NetD3_1: D3.1 U2.1 | length 2.9
  Top Layer w0.254: D3.1 18.374,32.317 19.125,31.566 U2.1
NetD4_1: D4.1 U2.7 | length 2.9
  Top Layer w0.254: U2.7 17.855,23.625 18.363,23.117 18.363,22.09 D4.1
NetD10_1: D10.1 R49.2 | length 2.5
  Top Layer w0.254: D10.1 R49.2
NetP1_2: P1.2 R2.1 | length 3.5
  Top Layer w0.254: P1.2 40.23,16.67 42.4,14.5 R2.1
NetP2_2: P2.2 R2.2 R3.2 U3.3 | length 33.8
  Top Layer w0.254: U3.3 32.51,29.421 36.931,25 41.33,25 42.2,24.13 R3.2@42.2,19.923 ; R3.2@42.264,19.402 42.264,17.867 42.634,17.497 R2.2@42.634,16.619 ; R2.2@42.543,16.257 42.902,16.257 43.132,16.027 43.132,15.668 44.1,14.7 44.1,10.9 49.027,5.973 49.027,5.945 49.5,5.472 P2.2
NetP3_2: P3.2 R5.1 | length 3.3
  Top Layer w0.254: P3.2 R5.1@34.435,14.335
NetP4_2: P4.2 R5.2 R6.2 U3.5 | length 23.3
  Top Layer w0.254: U3.5 31.24,21.296 32.3,20.236 R6.2 32.332,19.268 32.332,18.368 32.7,18 34.131,18 34.634,17.497 R5.2@34.634,16.619 ; R5.2 34.6,15.326 34.749,15.177 35.415,15.177 36,14.592 36,10.4 38.3,8.1 P4.2@38.3,4.946
NetP5_2: P5.2 R8.1 | length 3.5
  Top Layer w0.254: P5.2 24.23,16.67 26.4,14.5 R8.1
NetP6_2: P6.2 R8.2 R9.2 U2.3 | length 31
  Top Layer w0.254: U2.3 16.585,28.959 20.544,25 21.6,25 26.2,20.4 R9.2 ; R9.2@26.264,19.402 26.264,17.867 26.634,17.497 26.634,16.619 28.1,15.153 28.1,14.77 28.1,14.5 28.1,11.6 27.233,10.733 P6.2
NetP7_2: P7.2 R11.1 | length 3.4
  Top Layer w0.254: P7.2 16.13,16.67 18.3,14.5 R11.1
NetP8_2: P8.2 R11.2 R12.2 U2.5 | length 24.6
  Top Layer w0.254: U2.5 15.315,21.285 16.4,20.2 R12.2 ; P8.2@16.1,4.11 16.1,7.3 20,11.2 20,15.253 18.634,16.619 18.634,17.497 18.231,17.9 16.9,17.9 16.532,18.268 R12.2@16.532,19.068
NetP10_1: P10.1 R44.2 | length 2.5
  Top Layer w0.254: P10.1 R44.2
NetP10_2: P10.2 P11.1 U4.6 | length 13.1
  Top Layer w0.254: P11.1 56.8,6.8 57.726,7.726 P10.2 U4.6@57.726,17.736
NetP11_2: P11.2 R44.1 U4.7 | length 14.8
  Top Layer w0.254: U4.7@58.996,17.575 58.996,7.804 P11.2 ; 59.145,15.262 R44.1@60.177,15.262
NetP13_1: P13.20 Q3.1 | length 22.3
  Top Layer w0.254: Q3.1 59.288,84.712 60.586,83.414 P13.20
NetP13_9: P13.12 R36.1 | length 75.7
  Top Layer w0.254: P13.12 64.586,77.157 65.375,77.946 77.197,77.946 77.346,77.797 77.346,51.554 83.815,45.085 R36.1
NetP13_11: P13.10 R35.1 | length 79.2
  Top Layer w0.254: P13.10 65.586,76.743 66.335,77.492 76.743,77.492 76.892,77.343 76.892,51.366 84.458,43.8 89.827,43.8 104.1,43.8 104.3,44 104.3,46.7 R35.1@103.5,47.5
NetQ1_1: Q1.1 R14.2 | length 1.7
  Top Layer w0.254: R14.2 114.977,77.547 Q1.1
NetQ1_2: Q1.2 R15.1 | length 1.1
  Top Layer w0.254: R15.1@111.76,75.553 111.968,75.761 112.591,75.761 Q1.2@112.706,75.876
NetQ2_1: Q2.1 R17.2 | length 2
  Top Layer w0.254: Q2.1 120.584,75.751 120.832,75.503 120.957,75.503 121.034,75.426 R17.2@122.301,75.426
NetQ2_2: Q2.2 R16.1 | length 1.8
  Top Layer w0.254: R16.1@117.094,75.426 117.317,75.649 117.686,75.649 117.913,75.876 Q2.2
NetQ3_2: Q3.2 R45.1 R46.2 | length 4.6
  Top Layer w0.254: Q3.2 52.568,80.887 52.741,80.714 R45.1@52.741,78.301
NetR19_2: R19.2 U1.36 | length 6.7
  Top Layer w0.254: R19.2@123.444,30.051 R19.2@123.497,30.104 ; R19.2@123.497,30.051 R19.2@123.497,30.104 ; U1.36 R19.2@123.497,30.104
NetR20_2: R20.2 U1.37 | length 7.3
  Top Layer w0.254: U1.37 124.966,36.517 124.966,35.734 125.767,34.933 125.767,30.474 125.941,30.3 R20.2@126.3,30.3
NetR21_2: R21.2 U1.27 | length 7
  Top Layer w0.254: U1.27 112.014,36.663 112.014,35.786 113.157,34.643 R21.2
NetR22_1: R22.1 U1.10 | length 6.4
  Top Layer w0.254: R22.1 114.173,58.327 117.147,55.353 U1.10
NetR23_1: R23.1 U1.11 | length 7.7
  Top Layer w0.254: R23.1 111.76,57.44 112.3,56.9 113.662,56.9 115.554,55.008 115.554,54.539 U1.11
NetR24_1: R24.1 U1.13 | length 9.7
  Top Layer w0.254: R24.1 106.934,57.966 109.5,55.4 112.622,55.4 113.014,55.008 113.014,54.539 U1.13
NetR25_1: R25.1 U1.14 | length 10.5
  Top Layer w0.254: R25.1 104.521,58.079 108.384,54.216 U1.14
NetR26_1: R26.1 U1.23 | length 9
  Top Layer w0.254: R26.1 107.222,37.846 107.576,38.2 107.576,41.04 108.827,42.291 U1.23
NetR29_2: R29.2 U1.5 | length 5.4
  Top Layer w0.254: U1.5 123.4,54.313 123.4,56.8 123.825,57.225 R29.2
NetR30_2: R30.2 U1.6 | length 5.5
  Top Layer w0.254: R30.2 121.412,56.888 122.227,56.073 U1.6
NetR31_2: R31.2 U1.7 | length 6
  Top Layer w0.254: R31.2 118.999,57.701 120.957,55.743 U1.7
NetR32_2: R32.2 U1.12 | length 9.1
  Top Layer w0.254: R32.2 109.347,57.053 110.3,56.1 113.192,56.1 114.284,55.008 114.284,54.539 U1.12
NetR33_2: R33.2 U1.17 | length 6.5
  Top Layer w0.254: R33.2 106.414,52.324 108.827,49.911 U1.17
NetR34_2: R34.2 U1.18 | length 6
  Top Layer w0.254: R34.2 107.557,49.911 108.827,48.641 U1.18
NetR35_2: R35.2 U1.19 | length 5.6
  Top Layer w0.254: R35.2 108.7,47.498 108.827,47.371 U1.19
NetR36_2: R36.2 U1.20 | length 5.9
  Top Layer w0.254: R36.2 107.185,45.085 108.201,46.101 U1.20
NetR37_2: R37.2 U1.21 | length 6.4
  Top Layer w0.254: R37.2 105.4,42.778 105.4,42.8 106.9,42.8 108.931,44.831 U1.21
NetR38_1: R38.1 U1.26 | length 12.3
  Top Layer w0.254: R38.1 107.707,30.607 109.1,32 109.1,38.081 109.5,38.481 U1.26
NetR39_2: R39.2 U1.22 | length 7.6
  Top Layer w0.254: R39.2 106.727,40.259 107.068,40.6 107.068,41.802 108.827,43.561 U1.22
NetR40_1: R40.1 U1.16 | length 6.9
  Top Layer w0.254: R40.1 106.09,54.61 109.519,51.181 U1.16
NetR41_1: R41.1 U1.24 | length 10.4
  Top Layer w0.254: R41.1 107.617,35.433 108.084,35.9 108.084,40.278 108.827,41.021 U1.24
NetR42_2: R42.2 U1.9 | length 6
  Top Layer w0.254: R42.2 116.586,57.614 118.417,55.783 U1.9
NetR43_1: R43.1 U1.25 | length 11.5
  Top Layer w0.254: R43.1 107.612,33.02 108.592,34 108.592,39.516 108.827,39.751 U1.25
NetR47_2: R47.2 R48.1 U9.6 | length 4.9
  Top Layer w0.254: R48.1 107.442,20.042 107.4,20 U9.6 ; 107.549,20.042 R47.2
"RESET (GPIO0)": C7.2 D8.1 R13.1 R14.1 R21.1 | length 86.4
  Top Layer w0.254: C7.2@104.875,75.716 D8.1@107.415,75.716 ; D8.1 109.828,78.116 R14.1@113.258,78.116 ; R13.1 111.1,30.2 112.584,28.716 112.584,28.673 112.857,28.4 R21.1 113.457,28.4 115.057,26.8 v2(115.3,26.8)
  Layer 1 w0.254: v2(110.6,78.1) 125.043,78.1 125.192,77.951 125.192,34.692 122.6,32.1 120.6,32.1 v2(115.3,26.8)
RS485_!RE: R32.1 U4.2 | length 81.2
  Top Layer w0.254: U4.2 59.035,24.7 60.21,25.875 v2@60.21,25.975 ; R32.1 v2(109.347,63.2)
  Layer 1 w0.254: v2@59.7,25.9 60.135,25.9 60.35,26.115 60.35,26.988 60.962,27.6 91.512,27.6 109.347,45.435 v2(109.347,63.2)
  other v2: 60.267,26.1
RS485_DE: R42.1 U4.3 | length 97.5
  Top Layer w0.254: U4.3 57.765,25.265 v2@58.5,26 ; v2(116.53,63.2) 116.53,61.281 R42.1
  Layer 1 w0.254: v2@58.5,26.1 57.4,27.2 55.7,27.2 55.1,26.6 55.1,26 57,24.1 62.648,24.1 93.4,24.1 116.254,46.954 116.327,47.027 v2(116.53,63.2)
  other v2: 58.433,26.1
RS485_DI: R22.2 U4.4 | length 88.5
  Top Layer w0.254: U4.4 v2@56.5,25.9 ; R22.2 v2(114.173,63.2)
  Layer 1 w0.254: v2(56.6,26.1) 57.9,24.8 62.135,24.8 63.1,24.8 92.5,24.8 114.173,46.473 v2(114.173,63.2)
RS485_RO: R23.2 U4.1 | length 80.7
  Top Layer w0.254: U4.1 60.355,23.275 60.355,24.055 v2@62.25,25.95 ; R23.2 v2(111.76,63.2)
  Layer 1 w0.254: v2(62.1,26.1) 62.202,26.1 62.87,26.767 ; 62.87,26.8 92.704,26.8 111.8,45.896 v2@111.8,63.2
RTS: P9.5 Q2.3 R15.2 | length 26.4
  Top Layer w0.254: R15.2@111.76,74.053 113.296,72.517 118.675,72.517 Q2.3 119.634,79.597 120.396,80.359 120.396,85.957 120.247,86.106 117.729,86.106 P9.5
S-CS: P13.8 R37.1 | length 73.2
  Top Layer w0.254: P13.8 66.586,76.329 67.295,77.038 76.289,77.038 76.438,76.889 76.438,51.178 84.944,42.672 85.985,42.672 90.254,42.672 R37.1
S-D/CX: P13.7 R39.1 | length 73
  Top Layer w0.254: P13.7 67.086,76.122 67.548,76.584 75.835,76.584 75.984,76.435 75.984,51.966 75.984,50.99 86.715,40.259 92.025,40.259 R39.1
S-RESX: P13.14 R40.2 | length 71.7
  Top Layer w0.254: P13.14 63.586,77.571 64.415,78.4 77.651,78.4 77.8,78.251 77.8,55 78.19,54.61 R40.2
SCL: P13.2 R28.1 R33.1 U5.10 U6.2 | length 134.7
  Top Layer w0.254: U5.10 29.1,40 29.5,40.4 35.3,40.4 36.7,39 36.7,35.903 36.849,35.754 55.6,35.754 ; U6.2 55.6,38.565 55.6,35.754 ; v2(65.451,38.4) R28.1 62.1,38.4 61.833,38.133 61.833,35.29 61.566,35.023 60.536,35.023 59.805,35.754 55.6,35.754 ; v2(69.1,67.4) 69.1,67.675 69.586,68.161 P13.2 ; v2(101.4,52.3) 103.47,52.3 R33.1
  Layer 1 w0.254: v2(69.1,67.4) 69.6,66.9 69.6,65 65.451,60.851 v2(65.451,38.4) 65.59,38.261 65.59,37.61 67.416,35.784 98.412,35.784 100.2,37.572 100.2,51.1 v2(101.4,52.3)
SDA: P13.3 R27.1 R34.1 U5.9 U6.13 | length 139.1
  Top Layer w0.254: U5.9 30.1,39 30.3,39.2 30.3,39.751 30.449,39.9 34.9,39.9 36.2,38.6 36.2,35.449 36.349,35.3 59.617,35.3 60.348,34.569 61.754,34.569 62.485,35.3 R27.1@62.883,35.3 ; U6.13 55.54,33.86 55.5,33.9 61.9,33.9 62.987,34.986 62.987,35.197 R27.1@62.883,35.3 ; R27.1 62.883,35.968 R27.1@62.883,35.3 ; R27.1@62.851,36.1 v2(65.451,36.1) ; v2(68.1,66.1) 68.084,66.116 68.084,67.884 69.038,68.838 69.038,69.591 P13.3 ; v2@101.789,49.911 R34.1
  Layer 1 w0.254: v2@65.451,35.7 65.519,35.768 65.783,35.768 66.221,35.33 98.6,35.33 101.3,38.03 v2(101.3,49.9) ; v2(65.451,36.1) 64.4,37.151 64.4,60.5 68.136,64.236 68.136,66.064 v2(68.1,66.1)
TP-INT: P13.4 R41.2 | length 72.1
  Top Layer w0.254: P13.4 68.586,75.5 68.762,75.676 74.927,75.676 75.076,75.527 75.076,50.614 90.29,35.4 96.159,35.4 96.192,35.433 R41.2
TP-RESET: P13.5 R26.2 | length 72.3
  Top Layer w0.254: P13.5 68.086,75.707 68.509,76.13 75.381,76.13 75.53,75.981 75.53,50.802 88.486,37.846 R26.2
UART0_RX: C5.2 D6.1 P9.3 R19.1 | length 94.3
  Top Layer w0.254: C5.2@94.715,75.716 97.255,75.716 D6.1@97.417,75.716 ; D6.1@97.58,75.716 D6.1@97.417,75.716 ; P9.3 107.696,81.153 100.517,81.153 97.417,78.054 D6.1@97.417,75.716 ; v2(123.444,26.044) R19.1
  Layer 1 w0.254: P9.3 112.561,83.4 121.5,83.4 125.646,79.254 125.646,34.504 123.508,26.803 123.508,26.108 v2(123.444,26.044)
UART0_TX: C6.2 D7.1 P9.4 R20.1 | length 89.3
  Top Layer w0.254: D7.1@99.795,75.716 102.335,75.716 102.66,75.716 107.081,80.137 109.22,80.137 P9.4 ; v2(125.857,26.143) R20.1
  Layer 1 w0.254: P9.4@113.6,84.5 115.2,86.1 119.5,86.1 126.1,79.5 126.1,27.369 126.026,27.295 125.857,27.126 v2(125.857,26.143)
VCC: C12.1 C15.1 C24.1 L1.2 L2.1 P9.1 R3.1 R6.1 R9.1 R12.1 R13.2 R27.2 R28.2 U4.8 U5.8 U7.2 U7.3 U8.2 | length 37.5
  Top Layer w0.254: R12.1 24.3,19.2 R9.1 ; U5.8 31.1,38.5 v2(31.4,38.8) ; R6.1 R3.1@40.2,19.3 ; v2(58.951,40.2) R28.2@60.751,38.4 ; U4.8 v2(62.275,17.775) ; R27.2@61.051,35.7 R27.2 R28.2 ; C15.1 73.661,59.691 L2.1 ; C15.1@73.7,58.485 73.718,58.467 v2(73.718,55.818) ; v2(110.8,26.4) R13.2 ; v2(124.176,71) v2@124.451,71 ; C12.1@128.4,67.925 128.4,67.6 C12.1
  Top Layer w0.5: v2@124.451,71 124.947,70.504 125.296,70.504 126.6,69.2 127.125,69.2 C12.1@128.4,67.925 ; L1.2 C12.1
  other v2: 123.9,13.3 117.6,14.1 120.5,14.1 123.9,14.9 21.25,19.2 37.15,19.3
VLED-: R43.2 R45.2 | length 72.4
  Top Layer w0.254: R45.2 54.5,70.4 91.88,33.02 R43.2
pads on no net: P13.15 P13.NC U1.4 U1.8 U1.15 U1.28 U1.29 U1.30 U1.31 U1.32 U1.33 U1.34 U1.35 U1.38 U1.39 U5.2 U6.1 U6.3 U6.4 U6.5 U6.8 U6.9 U6.10 U6.12 U6.14 U7.4 U8.4 U9.7
copper on no net:
  other v3: 4,5 126,5 4,85 126,85

## Polygon pours and split planes (outlines as drawn)
GND on Top Layer "GND_L01_P010" (solid, pour order 10): 1,89 1,1 129,1 129,89
GND on Top Layer "PS_GND" (solid, pour order 9): 102.1,24.9 123.1,24.9 123.1,9.4 102.1,9.4
5V on Top Layer "5v_PwrPlane" (solid, pour order 5): 107.8,14.6 109,14.6 109,15.8 120.6,15.8 120.6,24.1 109.5,24.1 109.5,19.3 108,17.8 107.8,17.8
12V on Top Layer "12V_PwrPlane" (solid, pour order 2): 98,1.5 98,8 104.4,14.4 105.5,14.4 105.5,15.5 107,15.5 107,11.8 103,8 103,1.5
GND on Top Layer "ESP_Thermal_Connect" (solid, pour order 1): 118.3,49.3 123.7,49.3 123.7,44.6 118.3,44.6
VCC on Top Layer "Vcc_PwrPlane" (solid, pour order 0): 120.6,21.2 120.6,18.6 120.2,18.2 120.2,15.7 124.8,15.7 124.8,12.6 115.8,12.6 115.8,15.4 118.3,15.4 118.3,21.2
GND on Bottom Layer "GND_L04_P006" (solid, pour order 6): 1,89 1,1 129,1 129,89
GND on Layer 1 "GND_L02_P007" (solid, pour order 7): 1,89 1,1 129,1 129,89
VCC on Layer 2 "VCC_L03_P008" (solid, pour order 8): 1,89 1,1 129,1 129,89

## Silkscreen, mask and mechanical layers (free items; w line width, h text height)
Top Overlay:
  circle w0.254: c4,5 r3.5
  circle w0.254: c126,5 r3.5
  circle w0.254: c126,85 r3.5
  circle w0.254: c4,85 r3.5
  text "A" at 52.654,1.654 h1.52
  text "B" at 65.054,1.554 h1.52
Mechanical 1:
  lines w0.254: 0,0 0,90 130,90 130,0 ; 0.127,0 130.127,0

## Text inside footprints (layer, text, board x,y; h text height)
U1: Mechanical 13 "ANTENNA" at 132.817,49.966 h1.27 r270